# Altium PCB OMD_60V_REF_BK.PcbDoc (part 1 of 2)
Units mm, origin at the board's own origin, x right, y up, seen from the top; angles counter-clockwise.
Board outline 72 x 71.99 mm, 6 copper layers (Top Layer, L2, L3, L4, L5, Bottom Layer), stack 1.563 mm thick; 142 components, 145 nets, 791 pads, 505 vias.
Unrouted connection lines stored in the file: 199.
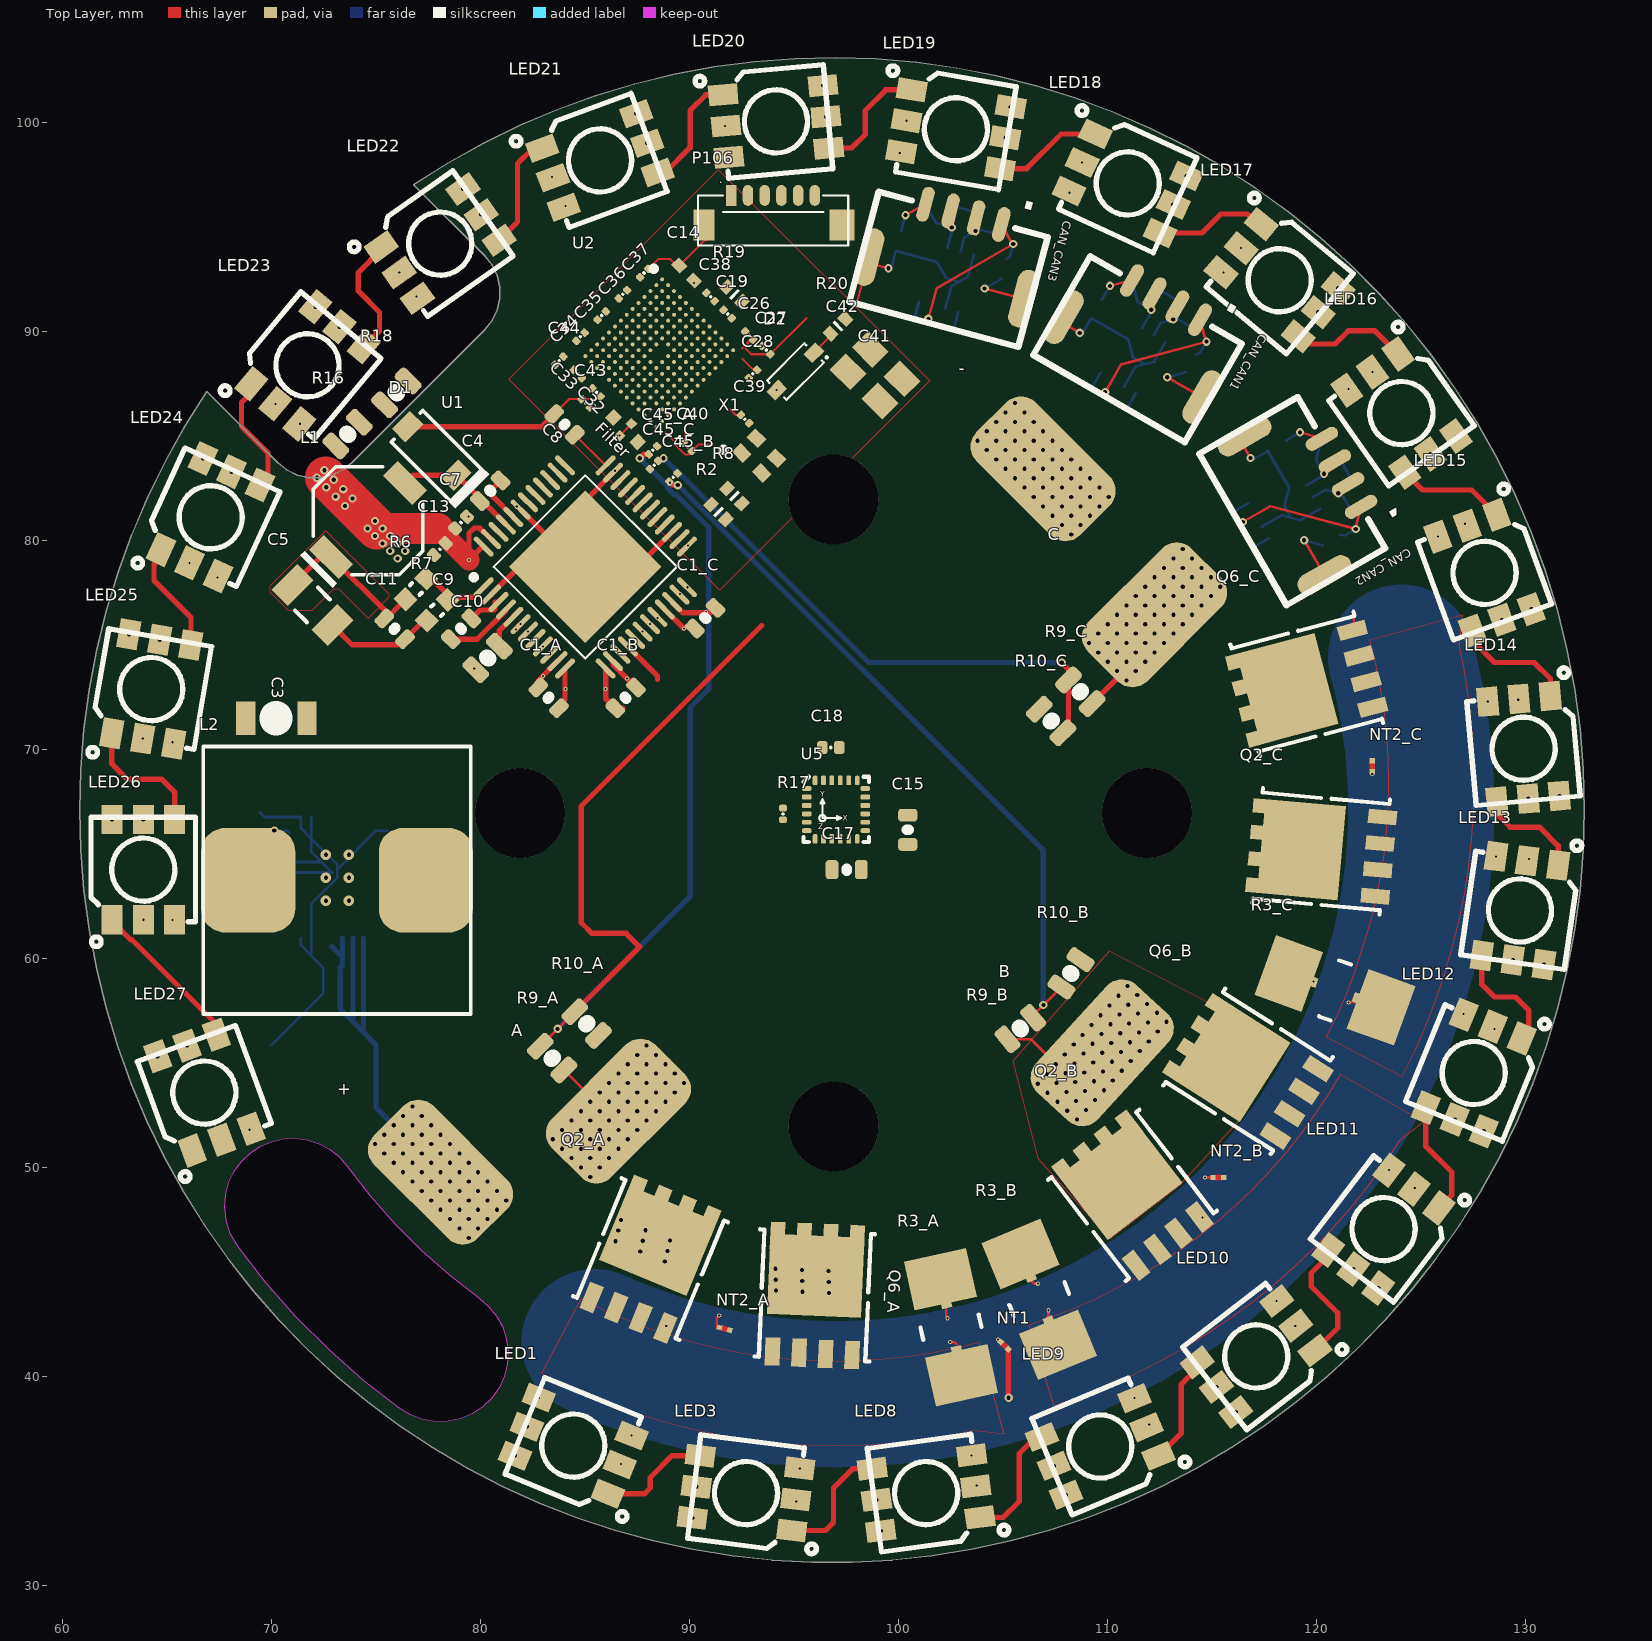
[diagram p0: Top Layer view]
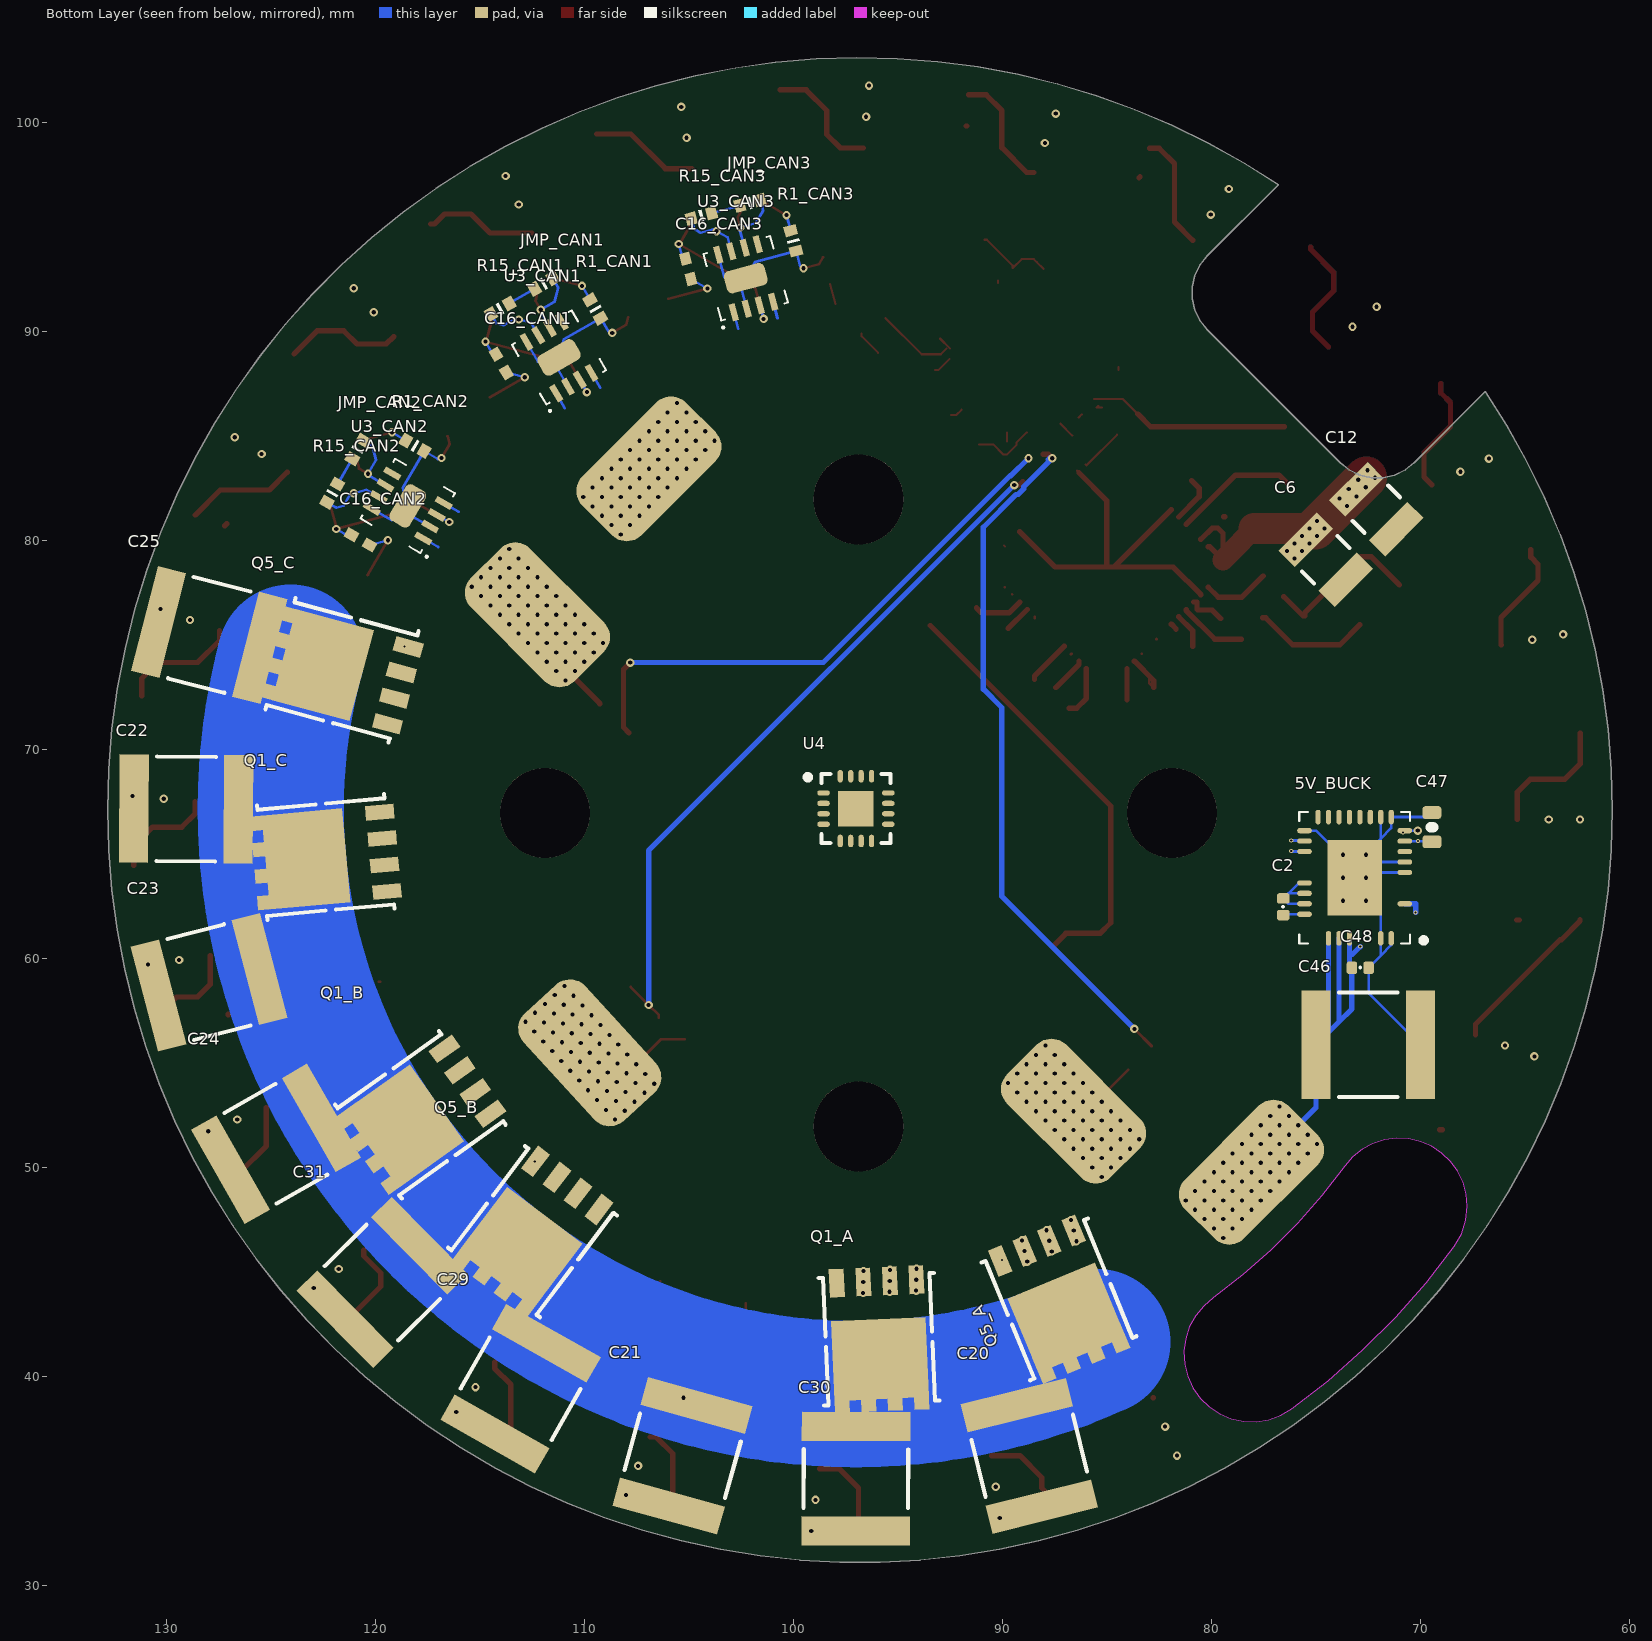
[diagram p1: Bottom Layer view, seen from below]
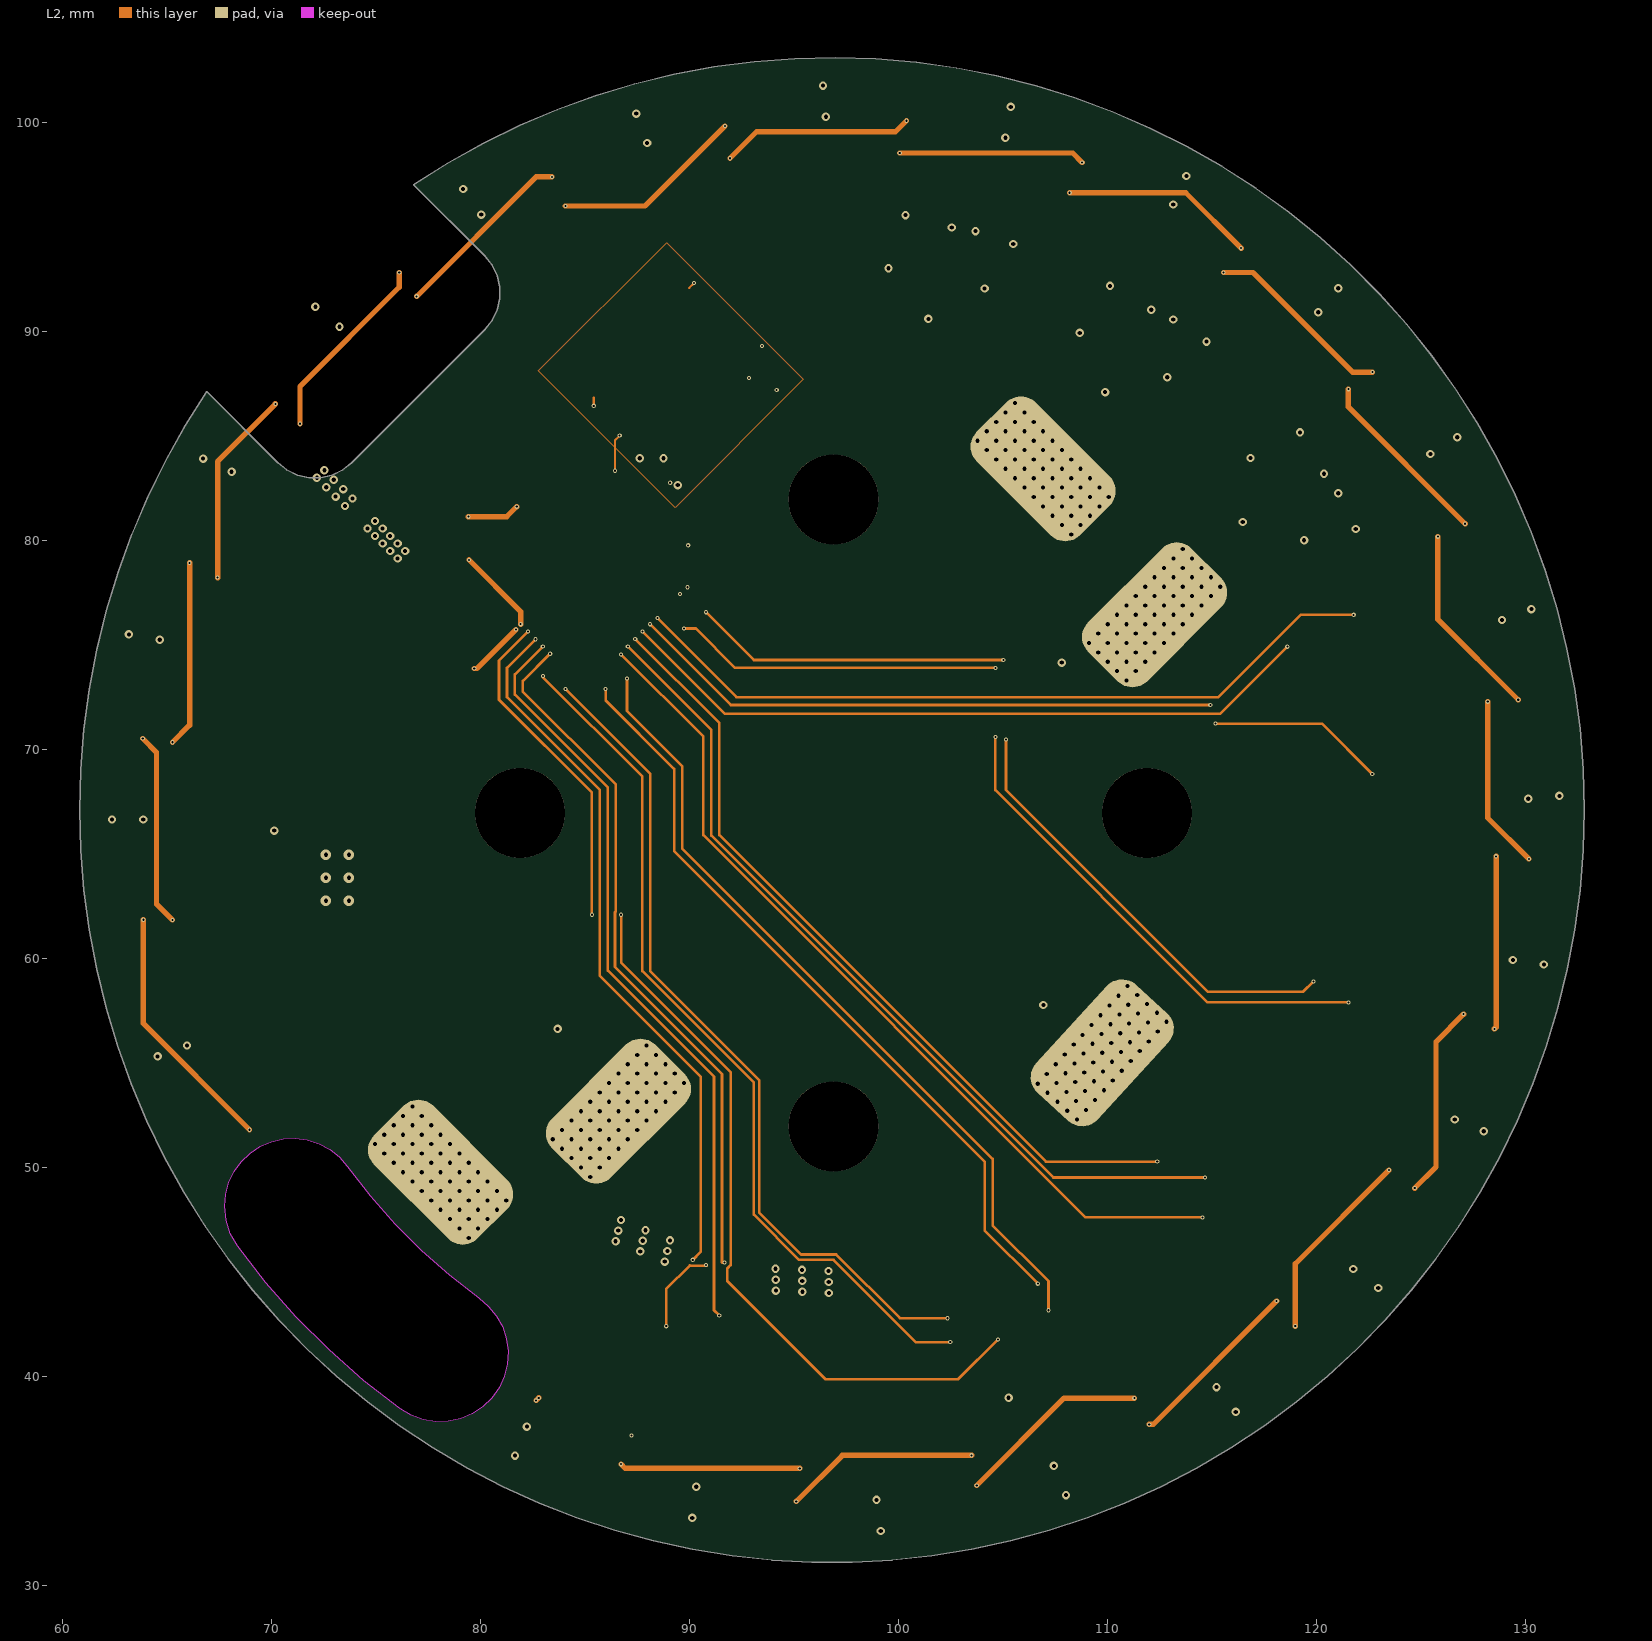
[diagram p2: L2]
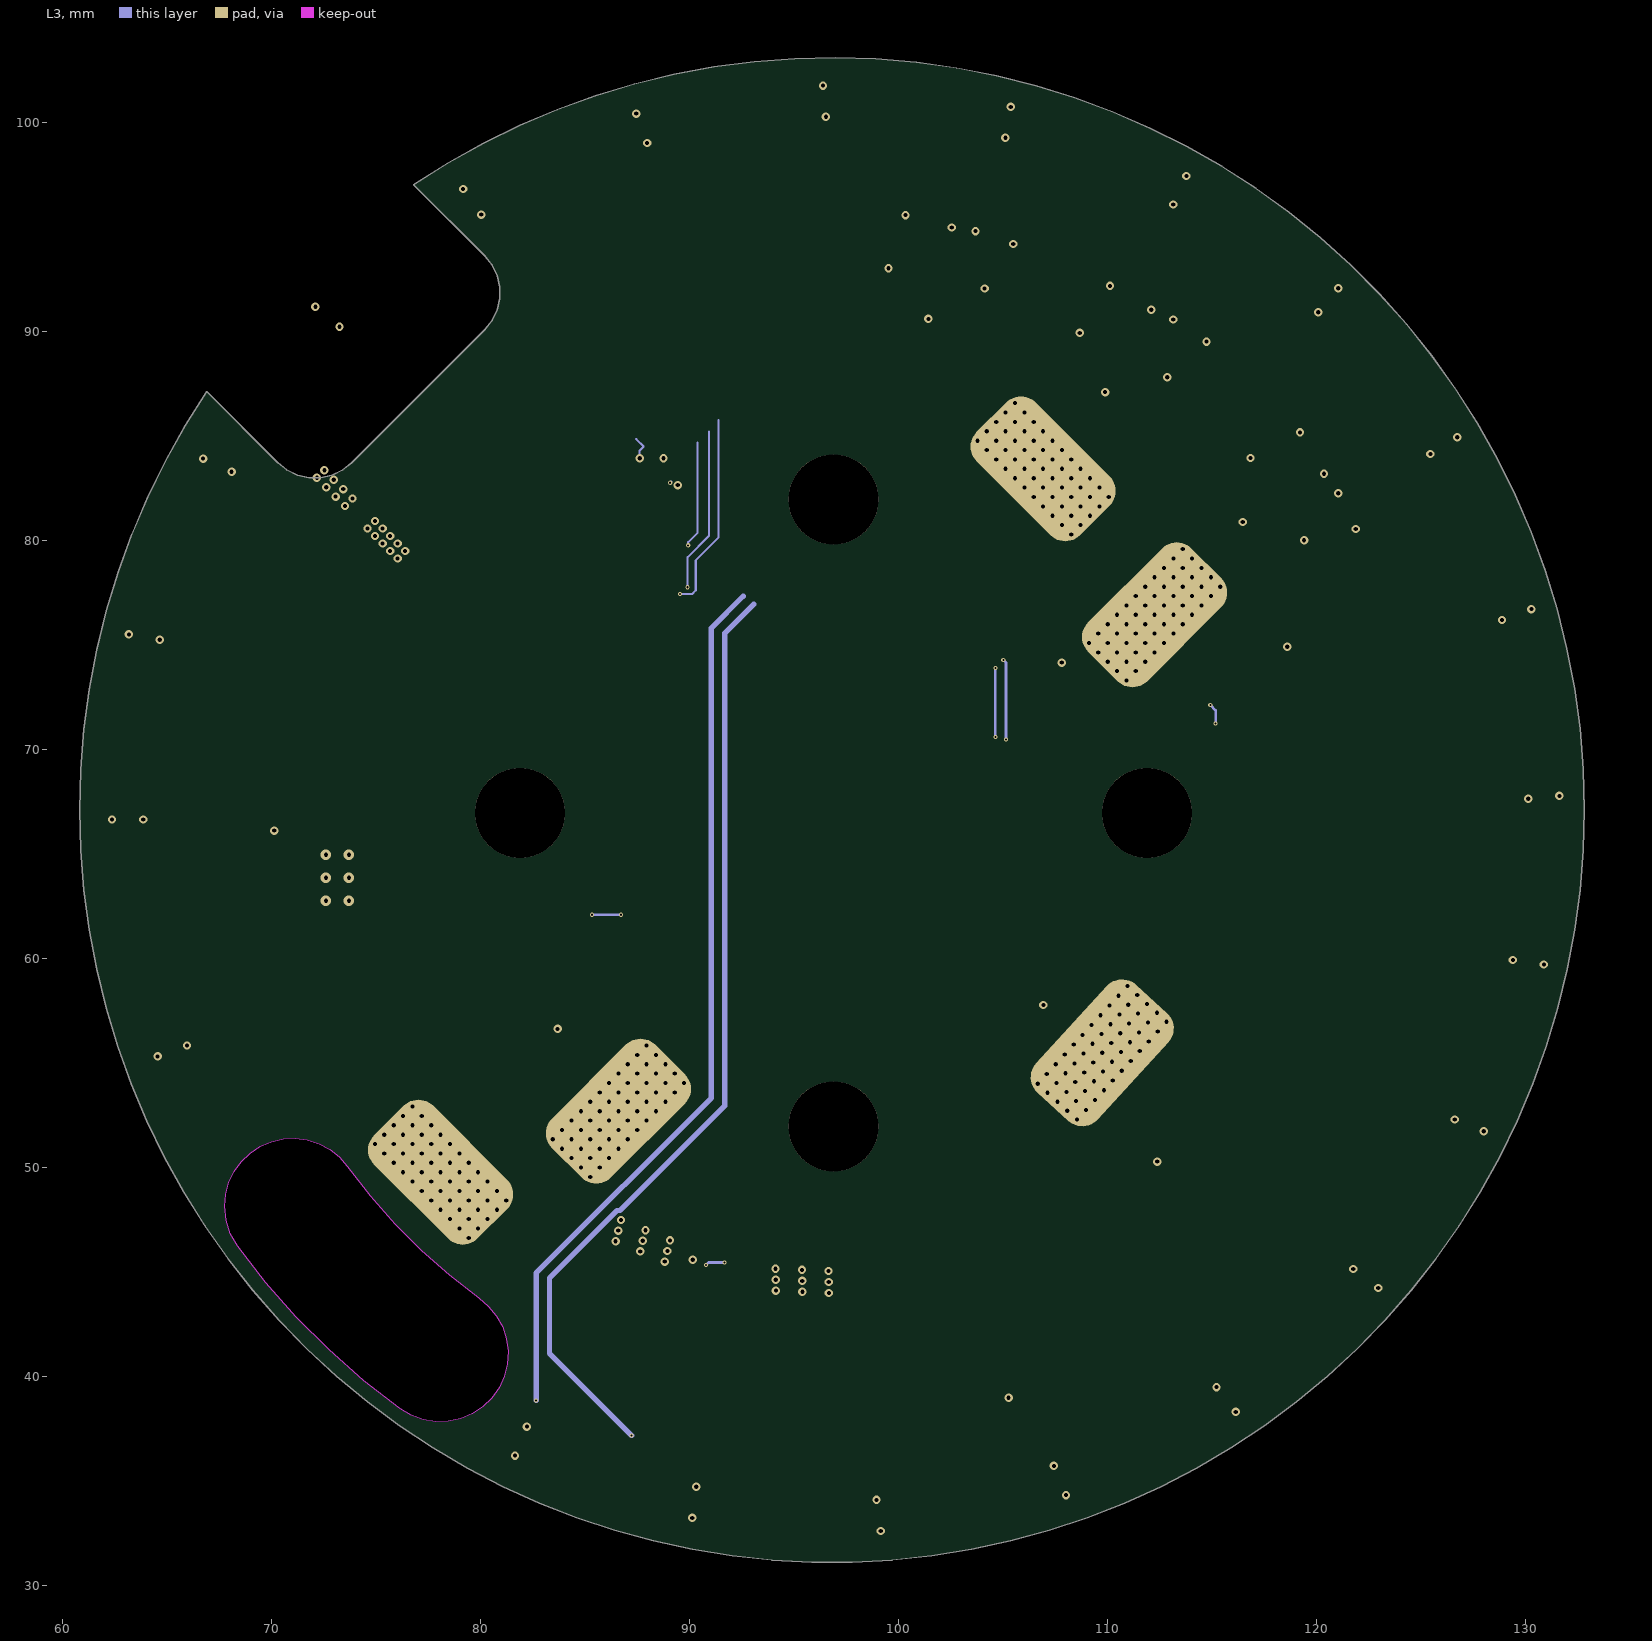
[diagram p3: L3]
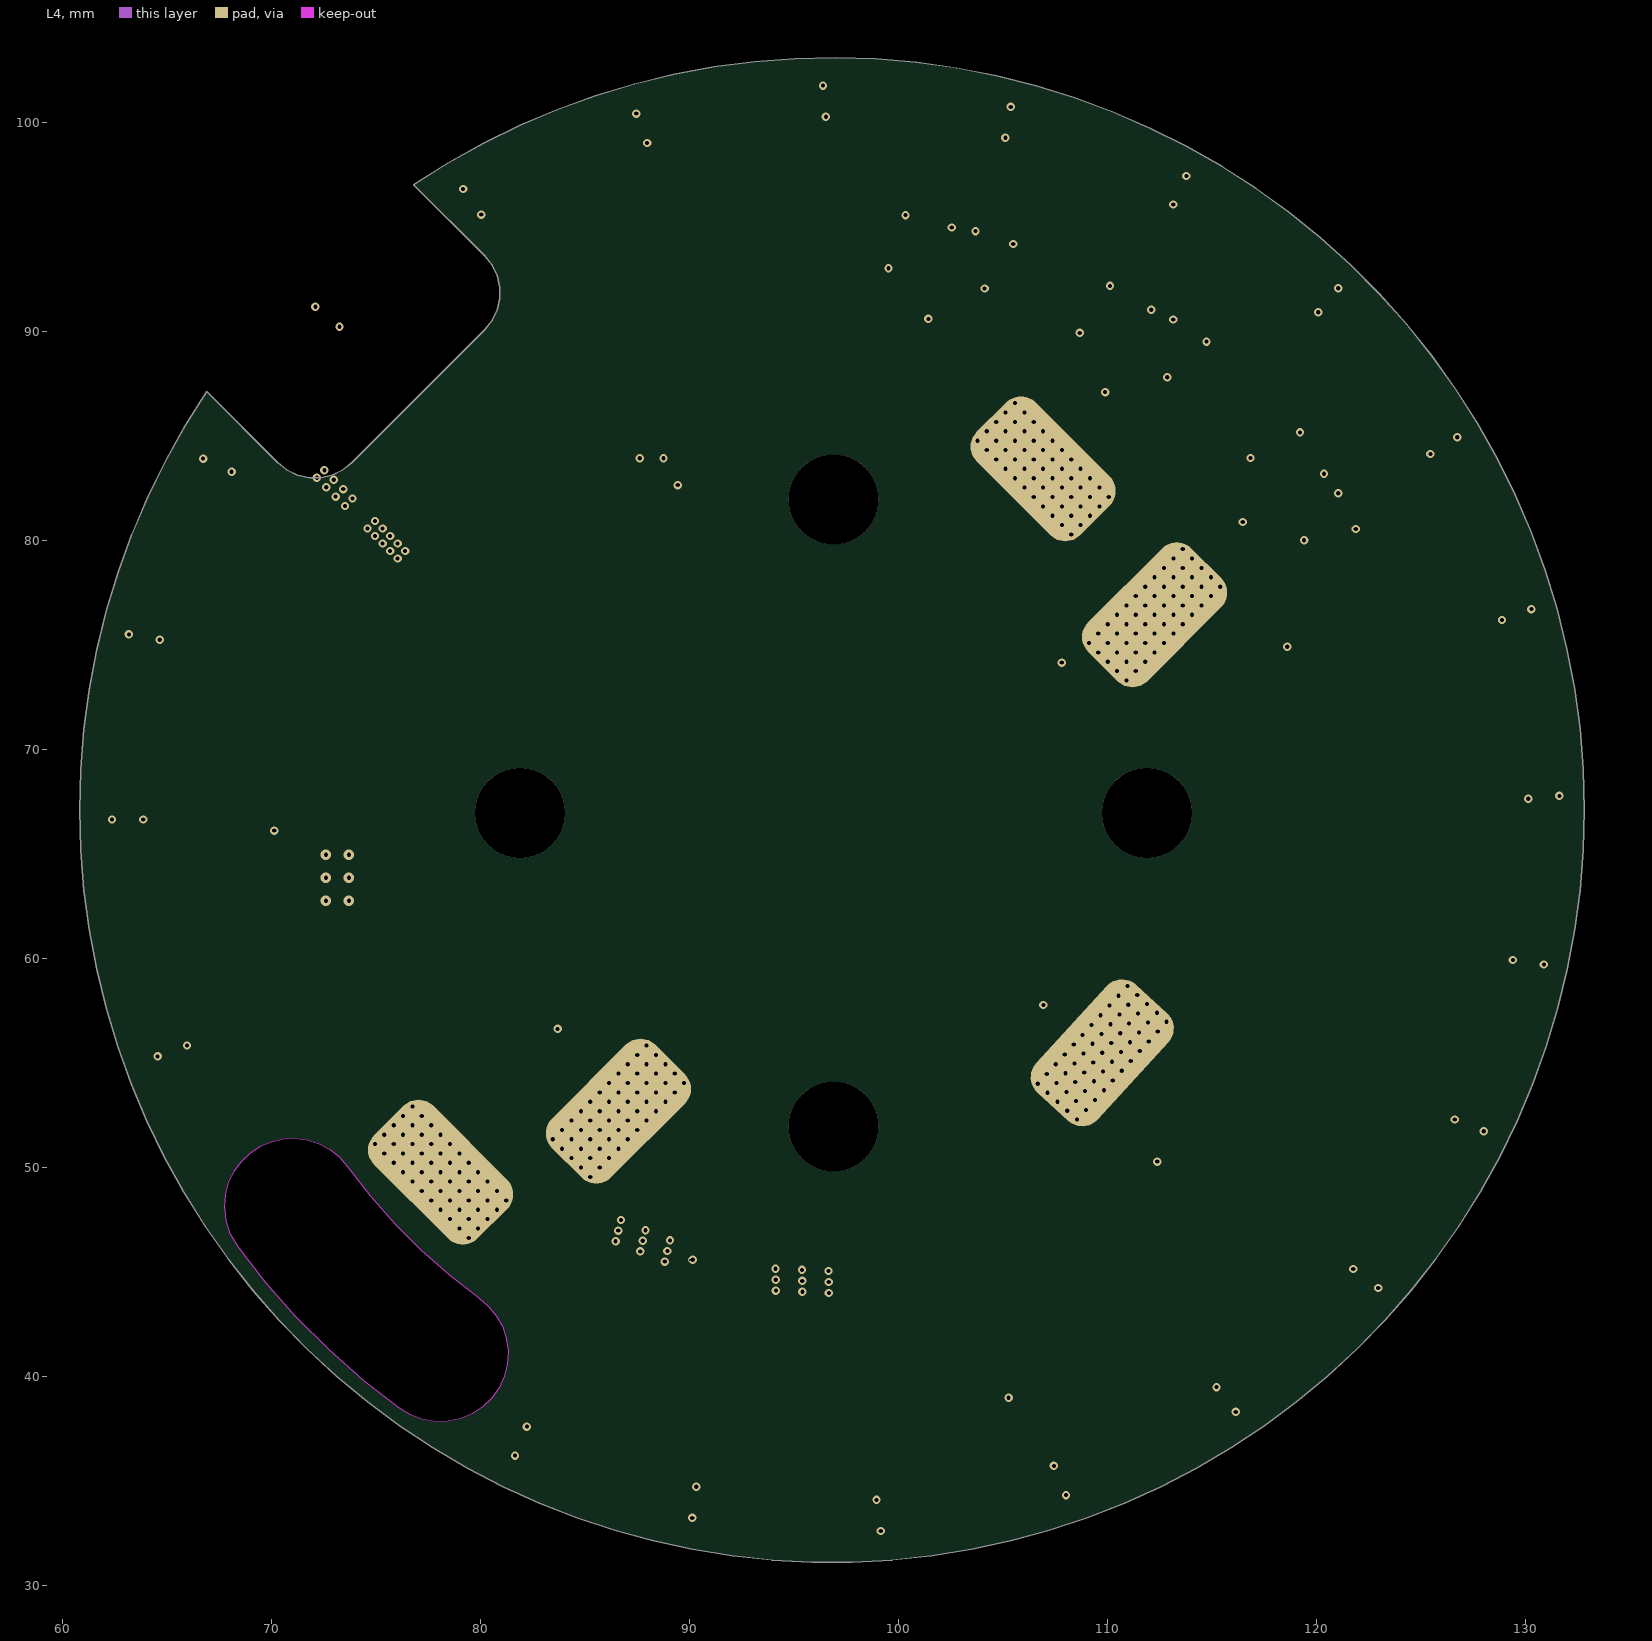
[diagram p4: L4]
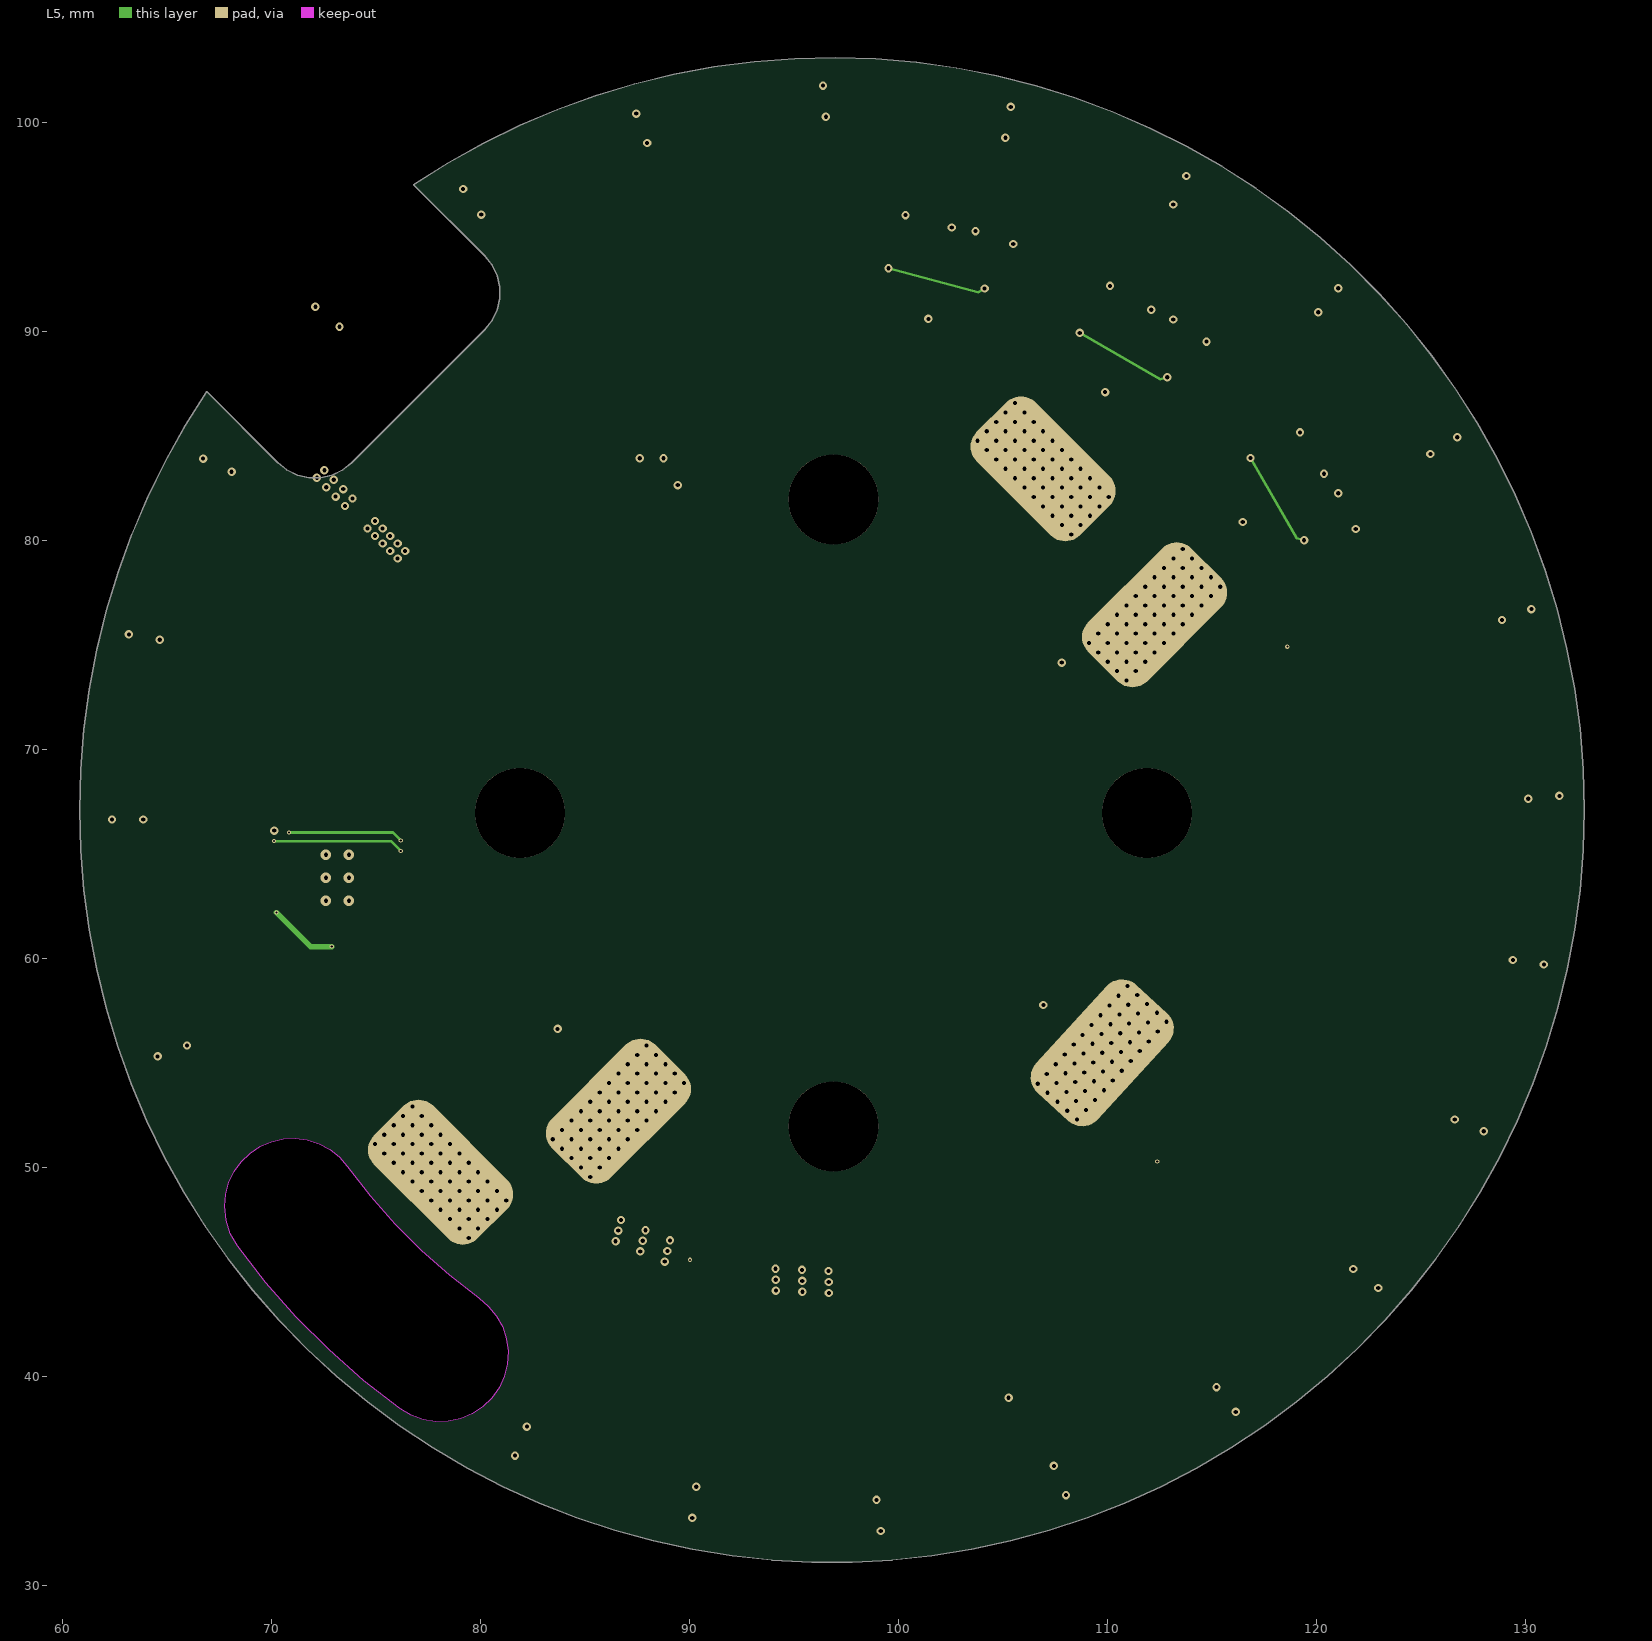
[diagram p5: L5]

## Layer stack, top to bottom
Top Solder: solder mask 0.0102, Solder Resist, Dk 3.5
Top Layer: signal copper 0.0356
Dielectric 1: dielectric 0.012, Polyamide, Dk 3.4
L2: signal copper 0.036
Dielectric 2: dielectric 0.012, Polyamide, Dk 3.4
L3: signal copper 0.036
Dielectric 3: core 1.3, FR4, Dk 4.2
L4: signal copper 0.036
Dielectric 4: dielectric 0.012, Polyamide, Dk 3.4
L5: signal copper 0.036
Dielectric 5: dielectric 0.012, Polyamide, Dk 3.4
Bottom Layer: signal copper 0.0356
Bottom Solder: solder mask 0.0102, Solder Resist, Dk 3.5

## Board outline
76.813,97.035 80.216,93.632 80.565,93.194 80.808,92.689 80.933,92.144 80.933,91.584 80.808,91.038 80.565,90.534 80.216,90.096 73.852,83.732 73.414,83.383 72.91,83.14 72.364,83.016 71.804,83.016 71.259,83.14 70.754,83.383 70.316,83.732 66.913,87.135 65.883,85.503 64.943,83.818 64.093,82.086 63.338,80.31 62.679,78.496 62.119,76.65 61.658,74.776 61.298,72.88 61.04,70.968 60.885,69.044 60.833,67.115 60.884,65.199 61.037,63.288 61.291,61.389 61.646,59.505 62.101,57.643 62.655,55.808 63.305,54.005 64.05,52.239 64.888,50.516 65.817,48.839 66.834,47.214 67.935,45.646 69.119,44.138 70.381,42.696 71.718,41.323 73.127,40.022 74.602,38.799 76.141,37.656 77.738,36.597 79.389,35.624 81.09,34.74 82.835,33.948 84.62,33.25 86.44,32.648 88.289,32.144 90.163,31.738 92.055,31.434 93.961,31.23 95.875,31.128 97.791,31.128 99.705,31.23 101.611,31.434 103.503,31.738 105.377,32.144 107.226,32.648 109.046,33.25 110.831,33.948 112.576,34.74 114.277,35.624 115.928,36.597 117.525,37.656 119.064,38.799 120.539,40.022 121.948,41.323 123.285,42.696 124.547,44.138 125.731,45.646 126.832,47.214 127.849,48.839 128.778,50.516 129.616,52.239 130.361,54.005 131.011,55.808 131.565,57.643 132.02,59.505 132.375,61.389 132.629,63.288 132.782,65.199 132.833,67.115 132.781,69.059 132.623,70.996 132.361,72.923 131.996,74.832 131.528,76.72 130.959,78.579 130.29,80.404 129.524,82.191 128.663,83.934 127.708,85.628 126.664,87.268 125.532,88.849 124.317,90.366 123.022,91.816 121.65,93.194 120.206,94.496 118.694,95.718 117.118,96.856 115.482,97.908 113.793,98.87 112.054,99.739 110.27,100.513 108.448,101.19 106.591,101.767 104.706,102.244 102.798,102.617 100.873,102.888 98.936,103.054 96.993,103.115 95.049,103.071 93.11,102.922 91.183,102.669 89.271,102.312 87.382,101.852 85.521,101.292 83.692,100.631 81.902,99.873 80.155,99.019 78.457,98.072
cut-out: 73.642,50.077 74.74,48.666 75.922,47.325 77.184,46.059 78.521,44.872 79.927,43.769 80.392,43.382 80.777,42.915 81.069,42.385 81.258,41.811 81.336,41.211 81.303,40.607 81.158,40.02 80.906,39.469 80.557,38.975 80.123,38.554 79.618,38.221 79.06,37.988 78.468,37.861 77.864,37.847 77.267,37.945 76.698,38.152 76.178,38.46 74.43,39.816 72.771,41.279 71.207,42.843 69.745,44.502 68.389,46.249 68.049,46.838 67.839,47.484 67.768,48.16 67.82,48.74 67.974,49.301 68.227,49.826 68.569,50.297 68.989,50.699 69.474,51.021 70.009,51.25 70.577,51.38 71.158,51.407 71.735,51.33 72.289,51.151 72.802,50.876 73.258,50.514

## Design rules (kind name [scope] priority, off if disabled: settings)
Clearance Clearance_1 [InNamedPolygon('VDD_3V3_L01_P002')or InNamedPolygon('GND_L01_P000')] p1: gap=0.08 ignorepadtopadclearanceinfootprint=FALSE
Clearance Clearance_F7 [InComponent('F7')] p2: gap=0.1 ignorepadtopadclearanceinfootprint=TRUE
Clearance [All] p3: gap=0.127 ignorepadtopadclearanceinfootprint=FALSE
ComponentClearance ComponentClearance_connector_3.5 [HasFootprint('MOTOR_PLUG_F_3.5')] p1: gap=-5 collisioncheckmode=3 verticalgap=-5 showdistances=FALSE
ComponentClearance [All] p2: gap=0.127 collisioncheckmode=3 verticalgap=0.254 showdistances=FALSE
PolygonConnect PolygonConnect_F7 [HasFootprint('WLCSP180')] p1: connectstyle=Relief reliefconductorwidth=0.08 reliefentries=4 polygonreliefangle="45 Angle" airgapwidth=0.08
PolygonConnect [All] p2: thpad.connectstyle=Relief thpad.reliefconductorwidth=0.254 thpad.reliefentries=4 thpad.polygonreliefangle="90 Angle" thpad.airgapwidth=0.254 smdpad.connectstyle=Relief smdpad.reliefconductorwidth=0.254 smdpad.reliefentries=4 smdpad.polygonreliefangle="90 Angle" smdpad.airgapwidth=0.254 via.connectstyle=Direct via.reliefconductorwidth=0.254 via.reliefentries=4 via.polygonreliefangle="90 Angle" via.airgapwidth=0.254
RoomDefinition CAN3 [InComponentClass('CAN3')] p1: confinementstyle=ConfineIn formatcopy=TRUE lockcomponents=FALSE outline 106.045,88.9 97.223,91.264 98.985,97.841 107.807,95.477
RoomDefinition CAN2 [InComponentClass('CAN2')] p2: confinementstyle=ConfineIn formatcopy=TRUE lockcomponents=FALSE outline 118.53,76.431 113.964,84.341 119.86,87.746 124.427,79.836
RoomDefinition CAN1 [InComponentClass('CAN1')] p3: confinementstyle=ConfineIn formatcopy=TRUE lockcomponents=FALSE outline 113.902,84.266 105.992,88.833 109.397,94.729 117.307,90.163
RoutingVias "uVia L1 L2" [InDrillLayerPair('Top Layer - L2')] p1: holewidth=0.1 width=0.2 viastyle="Through Hole" minholewidth=0.1 minwidth=0.2 maxholewidth=0.1 maxwidth=0.2
RoutingVias "uVia L1 L3" [InDrillLayerPair('Top Layer - L3')] p2: holewidth=0.1 width=0.2 viastyle="Through Hole" minholewidth=0.1 minwidth=0.2 maxholewidth=0.1 maxwidth=0.2
RoutingVias "uVia L2 L3" [InDrillLayerPair('L2 - L3')] p3: holewidth=0.1 width=0.2 viastyle="Through Hole" minholewidth=0.1 minwidth=0.2 maxholewidth=0.1 maxwidth=0.2
RoutingVias "uVia L4 L6" [InDrillLayerPair('L4 - Bottom Layer')] p4: holewidth=0.1 width=0.2 viastyle="Through Hole" minholewidth=0.1 minwidth=0.2 maxholewidth=0.1 maxwidth=0.2
RoutingVias "uVia L4 L5" [InDrillLayerPair('L4 - L5')] p5: holewidth=0.1 width=0.2 viastyle="Through Hole" minholewidth=0.1 minwidth=0.2 maxholewidth=0.1 maxwidth=0.2
RoutingVias "uVia L5 L6" [InDrillLayerPair('L5 - Bottom Layer')] p6: holewidth=0.1 width=0.2 viastyle="Through Hole" minholewidth=0.1 minwidth=0.2 maxholewidth=0.1 maxwidth=0.2
RoutingVias "L3 L4" [InDrillLayerPair('L3 - L4')] p7: holewidth=0.2 width=0.4 viastyle="Through Hole" minholewidth=0.2 minwidth=0.4 maxholewidth=0.2 maxwidth=0.4
RoutingVias "L1 L6" [InDrillLayerPair('Top Layer - Bottom Layer')] p8: holewidth=0.2 width=0.4 viastyle="Through Hole" minholewidth=0.2 minwidth=0.4 maxholewidth=0.2 maxwidth=0.4
ShortCircuit shunt [HasFootprint('4RESC5125X09N')] p1: allowed=TRUE
ShortCircuit [All] p2: allowed=FALSE
SolderMaskExpansion [All] p1: expansion=0.102
Width Width_BATT [InNet('MCU_BATT_IN')] p1: maxlimit=8 minlimit=0.1 preferedwidth=0.254
Width [All] p2: maxlimit=0.254 minlimit=0.1 preferedwidth=0.127
28 further rules are at their usual default settings.

## Classes and differential pairs
component class 5V_REG: 5V_BUCK C2 C3 C46 C47 C48 L2
channel class OMD_CAN_VERT: CAN1 CAN2 CAN3
component class LED: LED1 LED3 LED8 LED9 LED10 LED11 LED12 LED13 LED14 LED15 LED16 LED17 LED18 LED19 LED20 LED21 LED22 LED23 LED24 LED25 LED26 LED27
component class IMU: C15 C17 C18 R17 U5
component class F7_MCU: C14 C19 C26 C27 C28 C32 C33 C34 C35 C36 C37 C38 C39 C40 C41 C42 C43 C44 D2 Filter P106 R16 R18 R19 R20 X1
component class ENC: U4
component class DRIVER_60V: C4 C5 C6 C7 C8 C9 C10 C11 C12 C13 C20 C21 C22 C23 C24 C25 C29 C30 C31 D1 L1 R2 R6 R7 R8 U1
component class C: C1_C C45_C NT2_C Q1_C Q2_C Q5_C Q6_C R3_C R9_C R10_C
component class B: C1_B C45_B NT2_B Q1_B Q2_B Q5_B Q6_B R3_B R9_B R10_B
component class A: C1_A C45_A NT2_A Q1_A Q2_A Q5_A Q6_A R3_A R9_A R10_A
component class OMD_F7_CAN_60V_layout: + - A B C NT1
component class CAN3: C16_CAN3 CAN_CAN3 JMP_CAN3 R1_CAN3 R15_CAN3 U3_CAN3
component class CAN2: C16_CAN2 CAN_CAN2 JMP_CAN2 R1_CAN2 R15_CAN2 U3_CAN2
component class CAN1: C16_CAN1 CAN_CAN1 JMP_CAN1 R1_CAN1 R15_CAN1 U3_CAN1
channel class OMD_Fets_80A: A B C

## Components (designator, comment, footprint, x,y, rotation, side; value= is the part's Value field where it differs from the comment)
5V_BUCK "LTC7103" LTC7103 73.165,63.877 r0 bottom
+ "BATT" MOTOR_PLUG_F_3.5 78.105,49.784 r225 top
- "GND" MOTOR_PLUG_F_3.5 106.934,83.439 r45 top
A "Motor_pad" MOTOR_PLUG_F_3.5 86.614,52.705 r135 top
B "Motor_pad" MOTOR_PLUG_F_3.5 109.762,55.498 r317.5 top
C "Motor_pad" MOTOR_PLUG_F_3.5 112.268,76.454 r315 top
C1_A "PartNumber" 0603-CAP 83.273,72.484 r315 top value=1000pF (schematic designator C1)
C1_B "PartNumber" 0603-CAP 86.956,72.484 r225 top value=1000pF (schematic designator C1)
C1_C "PartNumber" 0603-CAP 90.766,76.294 r45 top value=1000pF (schematic designator C1)
C2 "0u1" 0402-CAP 76.581,62.484 r90 bottom
C3 "100u" 1206-CAP 70.231,71.501 r0 top
C4 "PartNumber" 0603-CAP 80.479,82.39 r45 top value=0.1uF
C5 "PartNumber" 1206_180L 71.97,76.929 r315 top value=22uF
C6 "PartNumber" 1210L 74.549,79.088 r225 bottom value=2.2uF
C7 "0u1" 0402-CAP 79.082,80.866 r45 top
C8 "PartNumber" 0603-CAP 84.035,85.565 r135 top value=1uF
C9 "PartNumber" 0603-CAP 79.082,75.786 r225 top value=0.047uF
C10 "1u" 0805-CAP 80.352,74.389 r225 top
C11 "PartNumber" 0603-CAP 75.907,75.786 r135 top value=1uF
C12 "PartNumber" 1210_270L 72.124,81.513 r225 bottom value=4.7uF
C13 "0u1" 0402-CAP 78.066,79.596 r225 top
C14 "CAP CER 10000PF 50V X7R 0402" CAPC1005L 89.877,92.804 r315 top value=10nF
C15 "2u2" 0603-CAP 100.457,66.167 r270 top
C16_CAN1 "Cap" CAPC1005L 114.006,88.488 r60 bottom value=1uF (schematic designator C16)
C16_CAN2 "Cap" CAPC1005L 120.731,80.036 r30 bottom value=1uF (schematic designator C16)
C16_CAN3 "Cap" CAPC1005L 105.052,93.005 r75 bottom value=1uF (schematic designator C16)
C17 "2u2" 0603-CAP 97.536,64.262 r0 top
C18 "0u1" 0402-CAP 96.774,70.104 r0 top
C19 "0u1" 0201-cap 91.838,90.843 r315 top
C20 "Cap" CAPC5750L 88.734,36.215 r76.03 bottom value=15uF
C21 "Cap" CAPC5750L 105.322,36.215 r105.45 bottom value=15uF
C22 "Cap" CAPC5750L 129.072,67.167 r180.44 bottom value=15uF
C23 "Cap" CAPC5750L 127.98,58.873 r165.31 bottom value=15uF
C24 "Cap" CAPC5750L 124.779,51.145 r150.3 bottom value=15uF
C25 "Cap" CAPC5750L 127.972,75.491 r194.34 bottom value=15uF
C26 "0u1" 0201-cap 92.869,89.812 r315 top
C27 "0u1" 0201-cap 93.687,89.121 r315 top
C28 "0u1" 0201-cap 93.052,87.978 r45 top
C29 "Cap" CAPC5750L 113.069,39.427 r119.54 bottom value=15uF
C30 "Cap" CAPC5750L 97.028,35.123 r90.22 bottom value=15uF
C31 "Cap" CAPC5750L 119.687,44.508 r135.31 bottom value=15uF
C32 "0u1" 0201-cap 85.559,87.089 r315 top
C33 "0u1" 0201-cap 84.67,87.978 r315 top
C34 "0u1" 0201-cap 84.797,89.756 r45 top
C35 "0u1" 0201-cap 85.813,90.772 r45 top
C36 "0u1" 0201-cap 86.829,91.788 r45 top
C37 "0u1" 0201-cap 87.845,92.804 r45 top
C38 "0u1" 0201-cap 91.02,91.661 r315 top
C39 "8p" 0201-cap 92.671,85.819 r135 top
C40 "8p" 0201-cap 89.933,84.493 r135 top
C41 "GRM21BR60G107ME15L" C0805 99.656,87.216 r45 top value=100uF
C42 "GRM21BR60G107ME15L" C0805 98.132,88.613 r45 top value=100uF
C43 "2u2" 0201-cap 85.051,86.581 r135 top
C44 "2u2" 0201-cap 83.781,88.613 r45 top
C45_A "0u1" 0201-cap 88.265,84.328 r45 top (schematic designator C45)
C45_B "0u1" 0201-cap 89.242,83.025 r45 top (schematic designator C45)
C45_C "0u1" 0201-cap 88.316,83.622 r225 top (schematic designator C45)
C46 "Cap" CAPC5750L 72.517,55.88 r0 bottom value=15uF
C47 "PartNumber" 0603-CAP 69.469,66.294 r270 bottom value=1uF
C48 "0u1" 0402-CAP 72.898,59.563 r180 bottom
CAN_CAN1 "JST_GH_V4" JST_GH_V4 110.091,86.789 r150 top (schematic designator CAN)
CAN_CAN2 "JST_GH_V4" JST_GH_V4 116.492,80.522 r120 top (schematic designator CAN)
CAN_CAN3 "JST_GH_V4" JST_GH_V4 101.711,90.351 r165 top (schematic designator CAN)
D1 "PartNumber" SOD-123FL 77.685,84.295 r135 top value=100V
D2 "Schottky barrier diode" SOD323 95.084,88.105 r225 top value=30V
Filter "Filter" NFM18CC 86.956,85.311 r315 top value=2.2uF
JMP_CAN1 "solder" R0402 111.959,92.309 r330 bottom (schematic designator JMP)
JMP_CAN2 "solder" R0402 120.869,84.369 r300 bottom (schematic designator JMP)
JMP_CAN3 "solder" R0402 102.086,96.167 r345 bottom (schematic designator JMP)
L1 "PartNumber" SD53 74.637,80.993 r45 top value=15uH
L2 "732-3880-2-ND" WE_IND 73.152,63.754 r180 top value=18uH
LED1 "?" UBLED 84.455,36.703 r157.75 top
LED3 "?" UBLED 92.718,34.43 r172.75 top
LED8 "?" UBLED 101.338,34.429 r187.75 top
LED9 "?" UBLED 109.664,36.66 r202.75 top
LED10 "?" UBLED 117.129,40.97 r217.75 top
LED11 "?" UBLED 123.225,47.066 r232.75 top
LED12 "?" UBLED 127.535,54.531 r247.75 top
LED13 "?" UBLED 129.751,62.31 r261.8 top
LED14 "?" UBLED 129.922,70.045 r275.25 top
LED15 "?" UBLED 128.057,78.461 r290.25 top
LED16 "?" UBLED 124.076,86.106 r305.25 top
LED17 "?" UBLED 118.253,92.462 r320.25 top
LED18 "?" UBLED 110.983,97.093 r335.25 top
LED19 "?" UBLED 102.762,99.685 r350.25 top
LED20 "?" UBLED 94.15,100.061 r5.25 top
LED21 "?" UBLED 85.734,98.196 r20.25 top
LED22 "?" UBLED 78.089,94.215 r35.25 top
LED23 "?" UBLED 71.733,88.392 r50.25 top
LED24 "?" UBLED 67.102,81.122 r65.25 top
LED25 "?" UBLED 64.262,72.898 r80.25 top
LED26 "?" UBLED 63.881,64.262 r90 top
LED27 "?" UBLED 66.802,53.594 r110.25 top
NT1 "Net-Tie" Net-Tie_10mil 105.087,41.482 r316.65 top net-tie
NT2_A "Net-Tie" Net-Tie_10mil 91.694,42.291 r345.23 top net-tie (schematic designator NT2)
NT2_B "Net-Tie" Net-Tie_10mil 115.316,49.53 r0 top net-tie (schematic designator NT2)
NT2_C "Net-Tie" Net-Tie_10mil 122.682,69.215 r90 top net-tie (schematic designator NT2)
P106 "JST_SUR_6" JST_SUR_H6 94.012,94.52 r0 top
Q1_A "MOSFET-N" Q5B 95.92,41.791 r267.5 bottom (schematic designator Q1)
Q1_B "MOSFET-N" Q5B 117.869,52.531 r324.6 bottom (schematic designator Q1)
Q1_C "MOSFET-N" Q5B 122.393,64.865 r354.81 bottom (schematic designator Q1)
Q2_A "MOSFET-N" Q5B 88.149,45.624 r67.6 top (schematic designator Q2)
Q2_B "MOSFET-N" Q5B 111.213,48.68 r127.5 top (schematic designator Q2)
Q2_C "MOSFET-N" Q5B 120.241,65.133 r174.83 top (schematic designator Q2)
Q5_A "MOSFET-N" Q5B 87.308,43.7 r247.5 bottom (schematic designator Q5)
Q5_B "MOSFET-N" Q5B 112.503,46.942 r307.1 bottom (schematic designator Q5)
Q5_C "MOSFET-N" Q5B 121.616,73.798 r15.09 bottom (schematic designator Q5)
Q6_A "MOSFET-N" Q5B 96.012,43.887 r87.5 top (schematic designator Q6)
Q6_B "MOSFET-N" Q5B 116.736,54.611 r147.5 top (schematic designator Q6)
Q6_C "MOSFET-N" Q5B 119.546,73.158 r194.9 top (schematic designator Q6)
R1_CAN1 "RES SMD 120 OHM 5% 1/16W 0402" R0402 109.496,91.092 r240 bottom value=120R (schematic designator R1)
R1_CAN2 "RES SMD 120 OHM 5% 1/16W 0402" R0402 118.128,84.546 r210 bottom value=120R (schematic designator R1)
R1_CAN3 "RES SMD 120 OHM 5% 1/16W 0402" R0402 100.023,94.353 r255 bottom value=120R (schematic designator R1)
R2 "RES SMD 10K OHM 5% 1/16W 0402" 0402-RES 91.401,81.374 r135 top value=10K
R3_A "Current sense resistor" 4RESC5125X09N 102.526,42.369 r102.5 top value=0.001R (schematic designator R3)
R3_B "Current sense resistor" 4RESC5125X09N 106.748,43.7 r112.5 top value=0.001R (schematic designator R3)
R3_C "Current sense resistor" 4RESC5125X09N 120.896,58.48 r160 top value=0.001R (schematic designator R3)
R6 "PartNumber" 0603L 76.923,77.691 r225 top value=28.0k
R7 "PartNumber" 0603L 77.939,76.675 r45 top value=8.45k
R8 "RES SMD 10K OHM 5% 1/16W 0402" 0402-RES 92.163,82.136 r135 top value=10K
R9_A "RES" R0805 83.439,55.245 r315 top value=18k (schematic designator R9)
R9_B "RES" R0805 105.844,56.66 r220 top value=18k (schematic designator R9)
R9_C "RES" R0805 108.712,72.771 r315 top value=18k (schematic designator R9)
R10_A "RES" R0805 85.09,56.896 r315 top value=1k (schematic designator R10)
R10_B "RES" R0805 108.263,59.3 r55 top value=1k (schematic designator R10)
R10_C "RES" R0805 107.315,71.374 r135 top value=1k (schematic designator R10)
R15_CAN1 "RES SMD 120 OHM 5% 1/16W 0402" R0402 114.049,91.103 r330 bottom value=120R (schematic designator R15)
R15_CAN2 "RES SMD 120 OHM 5% 1/16W 0402" R0402 122.076,82.279 r300 bottom value=120R (schematic designator R15)
R15_CAN3 "RES SMD 120 OHM 5% 1/16W 0402" R0402 104.417,95.542 r345 bottom value=120R (schematic designator R15)
R16 "RES" R0805 73.653,85.104 r225.22 top value=18k
R17 "3R" 0201-RES 94.488,66.929 r90 top
R18 "RES" R0805 75.987,87.076 r45.3 top value=1k
R19 "10K" 0402-RES 92.163,91.788 r315 top
R20 "1K" 0402-RES 97.116,90.264 r225 top
U1 "DRV8323R" PQFP-G48 85.03,78.745 r45 top
U2 "STM32F769AI" WLCSP180 88.568,88.972 r315 top
U3_CAN1 "CAN" SON65P300X100_HS-9N 111.234,88.768 r60 bottom (schematic designator U3)
U3_CAN2 "CAN" SON65P300X100_HS-9N 118.471,81.665 r30 bottom (schematic designator U3)
U3_CAN3 "CAN" SON65P300X100_HS-9N 102.303,92.559 r75 bottom (schematic designator U3)
U4 "MA700" QFN16 97.028,67.183 r180 bottom
U5 "ICM20649" ICM20649 97.025,67.129 r0 top
X1 "Crystal Oscillator in SMD 1.6 x 1.2" OSCILLATOR-1.6x1.2 93.345,84.074 r315 top

## Footprints (in the part's own frame and the unit in brackets; to place one, negate y for a bottom-side part, rotate by r counter-clockwise, add the part's x,y. Pads: shape width x height; smd on the part's side, far side on the other; paste and mask are expansions set on the pad)
4RESC5125X09N [mm] "Chip Resistor, 2-Leads + Kelvin terminals, Body 5.1x2.5mm, IPC Medium Density"
  rect 2.4x3.05 smd: 1(-2.35,0) 2(2.35,0)
  rect 0.5x0.5 smd: S1(-1.175,-0.025) S2(1.175,-0.025)
  silkscreen extent -0.3,-1.43 0.3,1.42, body extent -2.67,-1.4 2.67,1.4, height 0.89
0201-cap [mm]
  rrect50% 0.32x0.36 smd mask+0: 1(-0.28,0) 2(0.28,0)
  silkscreen extent 0,-0.01 0,0.03, body extent -0.3,-0.15 0.3,0.15, height 0.3
0201-RES [mm]
  rrect50% 0.32x0.36 smd mask+0: 1(-0.28,0) 2(0.28,0)
  silkscreen extent 0,-0.01 0,0.03, body extent -0.3,-0.15 0.3,0.15, height 0.12
0402-CAP [mil]
  rrect50% 20x24 smd mask+0: P$1(-15.75,0) P$2(15.75,0)
  silkscreen extent 0,0 0,1, body extent -20,-10 20,10, height 20
0402-RES [mil] "0402-RES"
  rect 20x24 smd: 1(-19.69,0) 2(20,0)
  silkscreen extent -3,-12 3,12, body extent -20,-10 20,10, height 20
0603-CAP [mil] "0603-CAP"
  rrect50% 24x36 smd mask+0: 1(-27.56,0) 2(27.56,0)
  silkscreen extent 0,-2 0,2, body extent -31,-16 31,16, height 34
0603L [mm] "0603 from SM-752 data"
  rect 0.8x0.85 smd: 1(-0.7,0) 2(0.7,0)
  silkscreen extent -0.07,-0.32 0.07,0.32, body extent -0.87,-0.47 0.87,0.47, height 1
0805-CAP [mil]
  rrect50% 28x52 smd mask+0: 1(-31.5,0) 2(31.5,0)
  silkscreen extent 0,-2 0,2, body extent -39,-25 39,25, height 31
1206-CAP [mil] "1206-CAP"
  rect 36x63 smd: 1(-57.09,0) 2(58,0)
  silkscreen extent 0,0 0,1
1206_180L [mm] "1206_180"
  rect 1.1x1.75 smd: 1(-1.35,0) 2(1.35,0)
  silkscreen extent -0.4,-0.77 0.4,0.77, body extent -1.75,-0.95 1.75,0.95, height 1.8
1210_270L [mm] "1210"
  rect 1.1x2.6 smd: 1(-1.35,0) 2(1.35,0)
  silkscreen extent -0.4,-1.2 0.4,1.2, body extent -1.7,-1.35 1.7,1.35, height 2.7
1210L [mm] "1210 from SM-752 data"
  rect 1.1x2.6 smd: 1(-1.35,0) 2(1.35,0)
  silkscreen extent -0.4,-1.2 0.4,1.2, body extent -1.7,-1.35 1.7,1.35, height 1.35
C0805 [mm] "Chip Capacitor, Body 2.0x1.3mm, IPC High Density"
  rect 1.1x1.4 smd: 1(-0.75,0) 2(0.75,0)
  body extent -1.1,-0.73 1.1,0.72, height 1.4
CAPC1005L [mm] "Chip Capacitor, Body 1.0x0.5mm, IPC High Density"
  rect 0.6x0.5 smd: 1(-0.5,0) 2(0.5,0)
  body extent -0.55,-0.3 0.55,0.3, height 0.6
CAPC5750L [mm] "Chip Capacitor, Body 5.7x5.0mm, IPC High Density"
  rect 1.4x5.2 smd: 1(-2.5,0) 2(2.5,0)
  silkscreen extent -1.4,-2.5 1.4,2.5, body extent -2.95,-2.62 2.95,2.63, height 1.35
ICM20649 [mm] "ICM20649"
  rrect70% 0.457x0.229 smd mask+0.05: 1(-1.4,1.016) 6(-1.4,-1) 13(1.4,-1) 18(1.4,1.016)
  rrect50% 0.457x0.229 smd mask+0.05: 2(-1.4,0.61) 3(-1.4,0.203) 4(-1.4,-0.2) 5(-1.4,-0.6) 14(1.4,-0.6) 15(1.4,-0.2) 16(1.4,0.203) 17(1.4,0.61)
  rrect70% 0.229x0.457 smd mask+0.05: 7(-1,-1.4) 12(1.016,-1.4) 24(-1,1.4)
  rrect50% 0.229x0.457 smd mask+0.05: 8(-0.6,-1.4) 9(-0.2,-1.4) 10(0.203,-1.4) 11(0.61,-1.4) 20(0.61,1.4) 21(0.203,1.4) 22(-0.2,1.4) 23(-0.6,1.4)
  rrect90% 0.229x0.457 smd mask+0.05: 19(1.016,1.4)
  silkscreen extent -1.55,-1.55 1.57,1.57
JST_GH_V4 [mil]
  rrect100% 24x67 smd: 1(-73.82,-214.57) 2(-24.61,-214.57) 3(25,-214.57) 4(74,-214.57)
  rrect100% 40x111 smd: GND(-150.59,-90.55) GND(151,-90.55)
  silkscreen extent -164,-215 165,0, body extent -162,-235 163,-40, height 165
JST_SUR_H6 [mm]
  rect 0.5x1 smd: 1(-2,2)
  rrect100% 0.5x1 smd: 2(-1.2,2) 3(-0.4,2) 4(0.4,2) 5(1.2,2) 6(2,2)
  rect 1x1.5 smd: GND(-3.3,0.585)
  rect 1.2x1.5 smd: GND(3.3,0.585)
  silkscreen extent -3.6,-0.4 3.6,2, body extent -3.5,-0.4 3.5,2.3, height 1.7
LTC7103 [mm]
  oval 0.7x0.25 smd: 3(-2.4,1.25) 6(-2.4,-0.25) 7(-2.4,-0.75) 8(-2.4,-1.25) 9(-2.4,-1.75) 10(-2.4,-2.25) 19(2.4,-2.25) 20(2.4,-1.75) 21(2.4,-1.25) 24(2.4,0.25) 25(2.4,0.75) 26(2.4,1.25) 27(2.4,1.75)
  oval 0.25x0.7 smd: 11(-1.75,-2.9) 12(-1.25,-2.9) 13(-0.75,-2.9) 14(-0.25,-2.9) 15(0.25,-2.9) 16(0.75,-2.9) 17(1.25,-2.9) 18(1.75,-2.9) 30(1.25,2.9) 31(0.75,2.9) 32(0.25,2.9) 35(-1.25,2.9) 36(-1.75,2.9)
  rect 2.6x3.6 smd: 37(0,0)
  silkscreen extent -3.42,-3.15 2.65,3.15, body extent -2.55,-3.05 2.55,3.05, height 0.75
MOTOR_PLUG_F_3.5 [mm]
  rrect50% 4x7 hole 0.2: 1(0,0)
Net-Tie_10mil [mil] "10mil net tie, no solder mask opening, no solder paste"
  rect 10x10 smd paste-5 mask-5: 1(-10,0) 2(10,0)
  Top Layer region: -6,5 6,5 6,-5 -6,-5
NFM18CC [mm] "Chip Capacitor, 3-Leads, Body 1.6x0.8mm"
  rect 0.55x0.6 smd: 1(-0.825,0) 3(0.825,0)
  rect 0.4x0.4 smd: 2(0,-0.4) 2(0,0.4)
  body extent -0.85,-0.45 0.85,0.45, height 0.7
OSCILLATOR-1.6x1.2 [mm] "OSCILLATOR-1.6x1.2"
  rect 0.75x0.6 smd: 1(-0.675,-0.5) 2(0.675,-0.5) 3(0.675,0.5) 4(-0.675,0.5)
  silkscreen extent -1.5,-1.12 -1.3,-0.91
PQFP-G48 [mm] "TSQFP, 48-Leads, Body 7.00x7.00mm, Pitch 0.50mm, Thermal Pad 5.17x5.17mm, IPC High Density"
  oval 1.25x0.25 smd: 1(-4.125,2.75) 2(-4.125,2.25) 3(-4.125,1.75) 4(-4.125,1.25) 5(-4.125,0.75) 6(-4.125,0.25) 7(-4.125,-0.25) 8(-4.125,-0.75) 9(-4.125,-1.25) 10(-4.125,-1.75) 11(-4.125,-2.25) 12(-4.125,-2.75) 25(4.125,-2.75) 26(4.125,-2.25) 27(4.125,-1.75) 28(4.125,-1.25) 29(4.125,-0.75) 30(4.125,-0.25) 31(4.125,0.25) 32(4.125,0.75) 33(4.125,1.25) 34(4.125,1.75) 35(4.125,2.25) 36(4.125,2.75)
  oval 0.25x1.25 smd: 13(-2.75,-4.125) 14(-2.25,-4.125) 15(-1.75,-4.125) 16(-1.25,-4.125) 17(-0.75,-4.125) 18(-0.25,-4.125) 19(0.25,-4.125) 20(0.75,-4.125) 21(1.25,-4.125) 22(1.75,-4.125) 23(2.25,-4.125) 24(2.75,-4.125) 37(2.75,4.125) 38(2.25,4.125) 39(1.75,4.125) 40(1.25,4.125) 41(0.75,4.125) 42(0.25,4.125) 43(-0.25,4.125) 44(-0.75,4.125) 45(-1.25,4.125) 46(-1.75,4.125) 47(-2.25,4.125) 48(-2.75,4.125)
  rect 5.17x5.17 smd: 49(0,0)
  silkscreen extent -4.25,-3.1 3.1,3.55, body extent -3.5,-3.5 3.5,3.5, height 1.05
Q5B [mm] "TI Q5B, 8-Leads, Body 5.1x6.1mm (max), Pitch 1.27mm, IPC Medium Density"
  rect 3.85x4.52 smd: D(0.95,0)
  rect 1.37x0.71 smd: D(2.77,0.635) D(2.77,1.905) D(2.77,-1.905) D(2.77,-0.635) G(-2.77,-1.905) S(-2.77,1.905) S(-2.77,0.635) S(-2.77,-0.635)
  silkscreen extent -3.05,-2.76 3.05,2.76, body extent -3.05,-2.55 3.05,2.55, height 1.05
QFN16 [mm]
  oval 0.6x0.25 smd: 1(-1.55,0.75) 2(-1.55,0.25) 3(-1.55,-0.25) 4(-1.55,-0.75) 9(1.55,-0.75) 10(1.55,-0.25) 11(1.55,0.25) 12(1.55,0.75)
  oval 0.25x0.6 smd: 5(-0.75,-1.55) 6(-0.25,-1.55) 7(0.25,-1.55) 8(0.75,-1.55) 13(0.75,1.55) 14(0.25,1.55) 15(-0.25,1.55) 16(-0.75,1.55)
  rect 1.7x1.7 smd: 17(0,0)
  silkscreen extent -2.42,-1.65 1.65,1.65, body extent -1.5,-1.5 1.5,1.5, height 0.9
R0402 [mil]
  rect 20x24 smd: 1(-19.68,0) 2(20,0)
  silkscreen extent -3,-12 3,12, body extent -20,-10 20,10, height 12
R0805 [mil]
  rrect50% 28x52 smd mask+0: 1(-31.5,0) 2(31.5,0)
  silkscreen extent 0,-2 0,2, body extent -39,-25 39,24, height 20
SD53 [mm] "COOPER BUSSMAN"
  rect 1x2 smd: 1(-2.5,0) 2(2.5,0)
  silkscreen extent -3.5,-2.9 2.4,2.9, body extent -2.86,-2.86 2.86,2.86, height 3.01
SOD323 [mil] "SOD323"
  rect 32x24 smd: A(50,0) C(-49.21,0)
  silkscreen extent -62,-26 50,26, body extent -49,-24 49,25, height 35
SOD-123FL [mm] "Copied from SOD-123"
  rect 0.915x1.22 smd: 1(-1.637,0) 2(1.638,0)
  silkscreen extent -2.74,-1.16 1.68,1.16, body extent -1.9,-0.9 1.9,0.9, height 1
SON65P300X100_HS-9N [mm] "SON, 8-Leads, Body 3.00x3.00mm, Pitch 0.65mm, Thermal Pad 2.40x1.59mm, IPC Medium Density"
  rect 0.85x0.3 smd: 1(-1.42,0.975) 2(-1.42,0.325) 3(-1.42,-0.325) 4(-1.42,-0.975) 5(1.42,-0.975) 6(1.42,-0.325) 7(1.42,0.325) 8(1.42,0.975)
  rrect50% 1.1x2 smd paste-0.795: 2(0,0)
  silkscreen extent -2.05,-1.65 1.65,1.7, body extent -1.55,-1.55 1.55,1.55, height 1
UBLED [mm]
  rect 1.4x1 smd: 1(-2.4,1.5) 2(-2.4,0) 3(-2.4,-1.5) 4(2.4,1.5) 5(2.4,0) 6(2.4,-1.5)
  silkscreen extent -3.68,-2.5 2.5,2.5, body extent -2.73,-2.61 2.68,2.64, height 1.5
WE_IND [mm] "FIXED IND 18UH 7.5A 22 MOHM SMD"
  rrect50% 4.5x5 smd: 1(-4.25,0) 2(4.25,0)
  silkscreen extent -6.4,-6.4 6.4,6.4, body extent -6.41,-6.41 6.41,6.41, height 6.2
WLCSP180 [mil] "WLCSP, 180-Leads, Body 5.54x6.09mmx0.58mm, Pitch 0.40mm"
  round 7.5 smd mask+1.57: A1(-94.49,102.36) A2(-78.74,102.36) A3(-62.99,102.36) A4(-47.24,102.36) A5(-31.5,102.36) A6(-15.75,102.36) A7(0,102.36) A8(15.75,102.36) A9(31.5,102.36) A10(47.24,102.36) A11(62.99,102.36) A12(78.74,102.36) A13(94.49,102.36) B1(-94.49,86.61) B2(-78.74,86.61) B3(-62.99,86.61) B4(-47.24,86.61) B5(-31.5,86.61) B6(-15.75,86.61) B7(0,86.61) B8(15.75,86.61) B9(31.5,86.61) B10(47.24,86.61) B11(62.99,86.61) B12(78.74,86.61) B13(94.49,86.61) C1(-94.49,70.87) C2(-78.74,70.87) C3(-62.99,70.87) C4(-47.24,70.87) C5(-31.5,70.87) C6(-15.75,70.87) C7(0,70.87) C8(15.75,70.87) C9(31.5,70.87) C10(47.24,70.87) C11(62.99,70.87) C12(78.74,70.87) C13(94.49,70.87) D1(-94.49,55.12) D2(-78.74,55.12) D3(-62.99,55.12) D4(-47.24,55.12) D5(-31.5,55.12) D6(-15.75,55.12) D7(0,55.12) D8(15.75,55.12) D9(31.5,55.12) D10(47.24,55.12) D11(62.99,55.12) D12(78.74,55.12) D13(94.49,55.12) E1(-94.49,39.37) E2(-78.74,39.37) E3(-62.99,39.37) E4(-47.24,39.37) E5(-31.5,39.37) E6(-15.75,39.37) E7(0,39.37) E8(15.75,39.37) E9(31.5,39.37) E10(47.24,39.37) E11(62.99,39.37) E12(78.74,39.37) E13(94.49,39.37) F1(-94.49,23.62) F2(-78.74,23.62) F3(-62.99,23.62) F4(-47.24,23.62) F5(-31.5,23.62) F6(-15.75,23.62) F7(0,23.62) F8(15.75,23.62) F9(31.5,23.62) F10(47.24,23.62) F11(62.99,23.62) F12(78.74,23.62) F13(94.49,23.62) G1(-94.49,7.87) G2(-78.74,7.87) G3(-62.99,7.87) G4(-47.24,7.87) G5(-31.5,7.87) G6(-15.75,7.87) G8(15.75,7.87) G9(31.5,7.87) G10(47.24,7.87) G11(62.99,7.87) G12(78.74,7.87) G13(94.49,7.87) H1(-94.49,-7.87) H2(-78.74,-7.87) H3(-62.99,-7.87) H4(-47.24,-7.87) H5(-31.5,-7.87) H6(-15.75,-7.87) H8(15.75,-7.87) H9(31.5,-7.87) H10(47.24,-7.87) H11(62.99,-7.87) H12(78.74,-7.87) H13(94.49,-7.87) J1(-94.49,-23.62) J2(-78.74,-23.62) J3(-62.99,-23.62) J4(-47.24,-23.62) J5(-31.5,-23.62) J6(-15.75,-23.62) J7(0,-23.62) J8(15.75,-23.62) J9(31.5,-23.62) J10(47.24,-23.62) J11(62.99,-23.62) J12(78.74,-23.62) J13(94.49,-23.62) K1(-94.49,-39.37) K2(-78.74,-39.37) K3(-62.99,-39.37) K4(-47.24,-39.37) K5(-31.5,-39.37) K6(-15.75,-39.37) K7(0,-39.37) K8(15.75,-39.37) K9(31.5,-39.37) K10(47.24,-39.37) K11(62.99,-39.37) K12(78.74,-39.37) K13(94.49,-39.37) L1(-94.49,-55.12) L2(-78.74,-55.12) L3(-62.99,-55.12) L4(-47.24,-55.12) L5(-31.5,-55.12) L6(-15.75,-55.12) L7(0,-55.12) L8(15.75,-55.12) L9(31.5,-55.12) L10(47.24,-55.12) L11(62.99,-55.12) L12(78.74,-55.12) L13(94.49,-55.12) M1(-94.49,-70.87) M2(-78.74,-70.87) M3(-62.99,-70.87) M4(-47.24,-70.87) M5(-31.5,-70.87) M6(-15.75,-70.87) M7(0,-70.87) M8(15.75,-70.87) M9(31.5,-70.87) M10(47.24,-70.87) M11(62.99,-70.87) M12(78.74,-70.87) M13(94.49,-70.87) N1(-94.49,-86.61) N2(-78.74,-86.61) N3(-62.99,-86.61) N4(-47.24,-86.61) N5(-31.5,-86.61) N6(-15.75,-86.61) N7(0,-86.61) N8(15.75,-86.61) N9(31.5,-86.61) N10(47.24,-86.61) N11(62.99,-86.61) N12(78.74,-86.61) N13(94.49,-86.61) P1(-94.49,-102.36) P2(-78.74,-102.36) P3(-62.99,-102.36) P4(-47.24,-102.36) P5(-31.5,-102.36) P6(-15.75,-102.36) P7(0,-102.36) P8(15.75,-102.36) P9(31.5,-102.36) P10(47.24,-102.36) P11(62.99,-102.36) P12(78.74,-102.36) P13(94.49,-102.36)
  silkscreen extent -125,100 -115,110, body extent -110,-120 110,120, height 31

## Part data
5V_BUCK: Supplier Part Number 1=24AC4318, Supplier 1=Newark
+ - A B C: library part Socket, "Socket"
C1_A C1_B C1_C: library part GRM188R71C102KA01D, "CAP, CERM, 1000pF, 16V, +/-10%, X7R, 0603", Supplier Part Number 1=GRM188R71C102KA01D-ND, Supplier 1=Digi-Key
C2 C7 C13 C48: library part CAP0402, "CAP CER 0.1UF 16V Y5V 0402", Supplier Part Number 1=490-10458-2-ND, Supplier 1=Digi-Key
C3: library part CAPACITOR-1206, PARTNO=C3216X5R1A107M160AC, Supplier Part Number 1=445-6007-2-ND, DOC_NUM=1, REV=X2, Supplier 1=Digi-Key, YEAR=2014
C4: library part 0603YC104JAT2A, "CAP, CERM, 0.1 µF, 16 V, +/- 5%, X7R, 0603", Supplier Part Number 1=478-3726-1-ND, Supplier 1=Digi-Key
C5: library part C3216X7S1A226M160AC, "CAP, CERM, 22 µF, 10 V, +/- 20%, X7S, 1206", Supplier Part Number 1=445-8035-1-ND, Supplier 1=Digi-Key
C6: library part HMK325B7225KN-T, "CAP, CERM, 2.2 µF, 100 V, +/- 10%, X7R, 1210", Supplier Part Number 1=587-1778-1-ND, Supplier 1=Digi-Key
C8 C11 C47: library part GRM188R70J105KA01D, "CAP, CERM, 1 µF, 6.3 V, +/- 10%, X7R, 0603", Supplier Part Number 1=490-3898-1-ND, Supplier 1=Digi-Key
C9: library part C1608X7S2A473K080AB, "CAP, CERM, 0.047 µF, 100 V, +/- 10%, X7S, 0603", Supplier Part Number 1=445-6032-1-ND, Supplier 1=Digi-Key
C10: library part CAP0603, "CAP CER 1UF 16V Y5V 0603", Supplier Part Number 1=490-14464-2-ND, Supplier 1=Digi-Key
C12: library part GRM32ER71K475KE14L, "CAP, CERM, 4.7 µF, 80 V, +/- 10%, X7R, 1210", Supplier Part Number 1=490-9972-1-ND, Supplier 1=Digi-Key
C14: library part Cap, Supplier Part Number 1=445-6893-1-ND, Supplier 1=Digi-Key
C15 C17: library part CAP0603, "CAP CER 2.2UF 16V 10% X6S 0603", Supplier Part Number 1=445-7438-1-ND, Supplier 1=Digi-Key
C16_CAN1 C16_CAN2 C16_CAN3: "CAP CER 1UF 6.3V X5R 0402", Supplier Part Number 1=587-3766-1-ND, Supplier 1=Digi-Key
C18: library part CAP0402, "CAP CER 0.1UF 16V Y5V 0402", Supplier Part Number 1=311-1047-1-ND, Supplier 1=Digi-Key
C19 C26 C27 C28 C32 C33 C34 C35 C36 C37 C38 C45_A C45_B C45_C: library part CAP0402, "CAP CER 0.1UF 6V Y5V 0201", Supplier Part Number 1=490-10404-2-ND, Supplier 1=Digi-Key
C20 C21 C22 C23 C24 C25 C29 C30 C31 C46: "Capacitor", Supplier Part Number 1=80X3236, Supplier 1=Newark
C39 C40: library part CAP0402, "CAP CER 8PF 50V NP0 0201", Supplier Part Number 1=490-13331-1-ND, Supplier 1=Digi-Key
C41 C42: library part Capacitor, Supplier Part Number 1=490-10510-1-ND, Supplier 1=Digi-Key
C43 C44: library part CAP0402, "CAP CER 2u2uF 6V Y5V 0201", Supplier Part Number 1=490-13224-1-ND, Supplier 1=Digi-Key
CAN_CAN1 CAN_CAN2 CAN_CAN3: "BM04B-GHS-TBT", Supplier Part Number 1=455-1580-2-ND, Supplier 1=Digi-Key
D1: library part MBR1H100SFT3G, "Diode, Schottky, 100 V, 1 A, SOD-123FL", Supplier Part Number 1=MBR1H100SFT3GOSCT-ND, Supplier 1=Digi-Key
D2: library part DIODE-SCHOTTKY_SOD323, "DIODE SCHOTTKY 30V 0.03A SOD323", Supplier Part Number 1=RB751V40T1GOSCT-ND, Supplier 1=Digi-Key
Filter: library part NFM18CC222R1C3, "EMIFIL (Capacitor type) Single Circuit Type for Signal Lines", Supplier Part Number 1=490-6972-1-ND, Supplier 1=Digi-Key
JMP_CAN1 JMP_CAN2 JMP_CAN3: library part Resistor
L1: library part SD53-150-R, "Inductor, Shielded Drum Core, Ferrite, 15 µH, 1.1 A, 0.122 ohm, SMD", Supplier Part Number 1=513-1458-1-ND, Supplier 1=Digi-Key
L2: library part SD53-150-R, "Description FIXED IND 18UH 7.5A 22 MOHM SMD", Supplier 1=Digi-Key, Supplier Part Number 1=732-3880-2-ND
LED1 LED3 LED8 LED9 LED10 LED11 LED12 LED13 LED14 LED15 LED16 LED17 LED18 LED19 LED20 LED21 LED22 LED23 LED24 LED25 LED26 LED27: library part UBLED, Supplier Part Number 1=PC5XS301V0500, Supplier 1=jeff_chang@ubleds.com.tw
NT1 NT2_A NT2_B NT2_C: "Single point connection between nets."
P106: "Connector, Header, 6Pos, .8mm IDC, R/A, SMD, Tin", Supplier Part Number 1=SM06B-SURS-TF(LF)(SN)-ND, Supplier 1=Digi-Key
Q1_A Q1_B Q1_C Q2_A Q2_B Q2_C Q5_A Q5_B Q5_C Q6_A Q6_B Q6_C: "N-Channel MOSFET", Supplier Part Number 1=296-37194-1-ND, Supplier 1=Digi-Key
R1_CAN1 R1_CAN2 R1_CAN3 R15_CAN1 R15_CAN2 R15_CAN3: library part Resistor, Supplier Part Number 1=311-120JRTR-ND, Supplier 1=Digi-Key
R2 R8: library part Resistor, Supplier Part Number 1=311-10KJRTR-ND, Supplier 1=Digi-Key
R3_A R3_B R3_C: library part WSLP20101L000FEK, "2W, 0.001R 5025 current sense resistor", Supplier Part Number 1=CSNL2010FT1L00CT-ND, Supplier 1=Digi-Key
R6: library part CRCW060328K0FKEA, "RES, 28.0 k, 1%, 0.1 W, 0603", Supplier Part Number 1=541-28.0KHCT-ND, Supplier 1=Digi-Key
R7: library part CRCW06038K45FKEA, "RES, 8.45 k, 1%, 0.1 W, 0603", Supplier Part Number 1=541-8.45KHCT-ND, Supplier 1=Digi-Key
R9_A R9_B R9_C R16: library part R00155, "RES SMD 18K OHM 1% 1/8W 0805", Supplier Part Number 1=311-18.0KCRCT-ND, Supplier 1=Digi-Key
R10_A R10_B R10_C R18: library part R00095, "RES SMD 1K OHM 1% 1/8W 0805", Supplier Part Number 1=311-1.00KCRCT-ND, Supplier 1=Digi-Key
R17: library part RESISTOR0402-RES, "RES 3OHM 1/16W 1% 0201 SMD", Supplier Part Number 1=P3.0AGTR-ND, Supplier 1=Digi-Key
R19: library part RESISTOR0402-RES, "RES 10K OHM 1/16W 1% 0402 SMD", Supplier Part Number 1=311-10.0KLRCT-ND, Supplier 1=Digi-Key
R20: library part RESISTOR0402-RES, "RES 1K OHM 1/16W 1% 0402", Supplier Part Number 1=1276-3430-1-ND, Supplier 1=Digi-Key
U1: Supplier Part Number 1=DRV8323RHRGZR-ND, Supplier 1=Digi-Key
U2: "STM32F7", Supplier Part Number 1=84Y8745, Supplier 1=Newark
U3_CAN1 U3_CAN2 U3_CAN3: Supplier Part Number 1=568-8686-2-ND, Supplier 1=Digi-Key
U4: Supplier Part Number 1=MA700GQ-Z-ND, Supplier 1=Digi-Key
U5: Supplier Part Number 1="Component Distributors Inc. - ICM-20649", Supplier 1=Octopart
X1: library part OSCILLATOR-3.2X2.5, "CRYSTAL 24MHZ 8PF SMD", Supplier Part Number 1=887-1846-2-ND, Supplier 1=Digi-Key

## Free pads (board coordinates)
  round 4.3 hole 4.3: 1(81.903,66.974) 1(96.903,51.974) 1(96.903,81.974) 1(111.903,66.974)

## Via types
v1: diameter 0.4, hole 0.2, Top Layer to Bottom Layer, 379 vias
v2: diameter 0.2, hole 0.1, Top Layer to L2, 86 vias
v3: diameter 0.2, hole 0.1, L2 to L3, 15 vias
v4: diameter 0.2, hole 0.1, L5 to Bottom Layer, 9 vias
v5: diameter 0.5, hole 0.2, Top Layer to Bottom Layer, 6 vias
v6: diameter 0.2, hole 0.1, Top Layer to L3, 4 vias
v7: diameter 0.2, hole 0.1, L4 to L5, 3 vias
v8: diameter 0.4, hole 0.2, L3 to L4, 3 vias

## Nets (pads, with @x,y where several pads share a name; then routed paths per layer and width w, separated by ;. In a path a pad name is that pad's centre, name@x,y a point inside that pad or via, vN(x,y) a via of type N, cw(c..) or ccw(c..) an arc to the next point about the centre after c; other vN are vias at no path point)
3V3_MCU: C5.1 C11.2 C14.2 C15.1 C18.P$1 C19.1 C26.1 C27.1 C28.1 C32.1 C33.1 C34.1 C35.1 C36.1 C37.1 D2.A Filter.1 L1.1 P106.1 R2.1 R6.2 R8.1 R17.1 U1.26 U2.A6 U2.B2 U2.B8 U2.B11 U2.C10 U2.F2 U2.F12 U2.J12 U2.K1 U2.K9 U2.M8 U2.P4 U3_CAN1.5 U3_CAN2.5 U3_CAN3.5 U4.13 U5.8 U5.13 | length 8.5
  Top Layer w0.1: C33.1@84.472,88.176 C33.1@84.472,88.303 ; Filter.1@86.222,86.045 Filter.1@86.373,85.894 ; v2(90.231,92.323) C14.2@90.231,92.45
  Top Layer w0.254: C5.1@71.016,77.884 72.357,79.225 L1.1@72.87,79.225 75.539,76.555 75.539,76.408 75.64,76.408 R6.2@76.555,77.323
  L2 w0.1: 90.004,92.097 v2(90.231,92.323)
  other v2: 94.186,87.207 92.854,87.78 93.489,89.319
3V3A: Filter.3 U2.M12
5V_MCU: 5V_BUCK.10 5V_BUCK.20 C3.1 L2.2 LED1.5 LED3.5 LED8.5 LED9.5 LED10.5 LED11.5 LED12.5 LED13.5 LED14.5 LED15.5 LED16.5 LED17.5 LED18.5 LED19.5 LED20.5 LED21.5 LED22.5 LED23.5 LED24.5 LED25.5 LED26.5 LED27.5 | length 7
  Top Layer w0.127: L2.2@70.104,66.167 v1(70.144,66.127)
  L5 w0.127: v4(70.852,66.04) 75.819,66.04 v4(76.2,65.659)
  Bottom Layer w0.127: v1(70.144,66.127) 5V_BUCK.10@70.765,66.127 v4(70.852,66.04) ; 5V_BUCK.20@75.565,65.627 75.597,65.659 v4(76.2,65.659)
  other v1: 98.96,34.106 90.337,34.733 107.451,35.733 82.234,37.612 115.232,39.501 121.772,45.155 126.626,52.31 65.971,55.846 129.409,59.935 63.881,66.662 130.142,67.655 64.669,75.263 128.887,76.209 68.107,83.301 125.461,84.146 73.268,90.237 120.098,90.927 80.049,95.6 113.162,96.088 87.986,99.026 105.127,99.279 96.54,100.281
BOOT0: R19.2 U2.A10
CAL: U1.34 U2.N6
ENABLE: U1.33 U2.M6